# EAGLE board akabeacon_square_type2_MDBT40 (EAGLE 7.2.0)
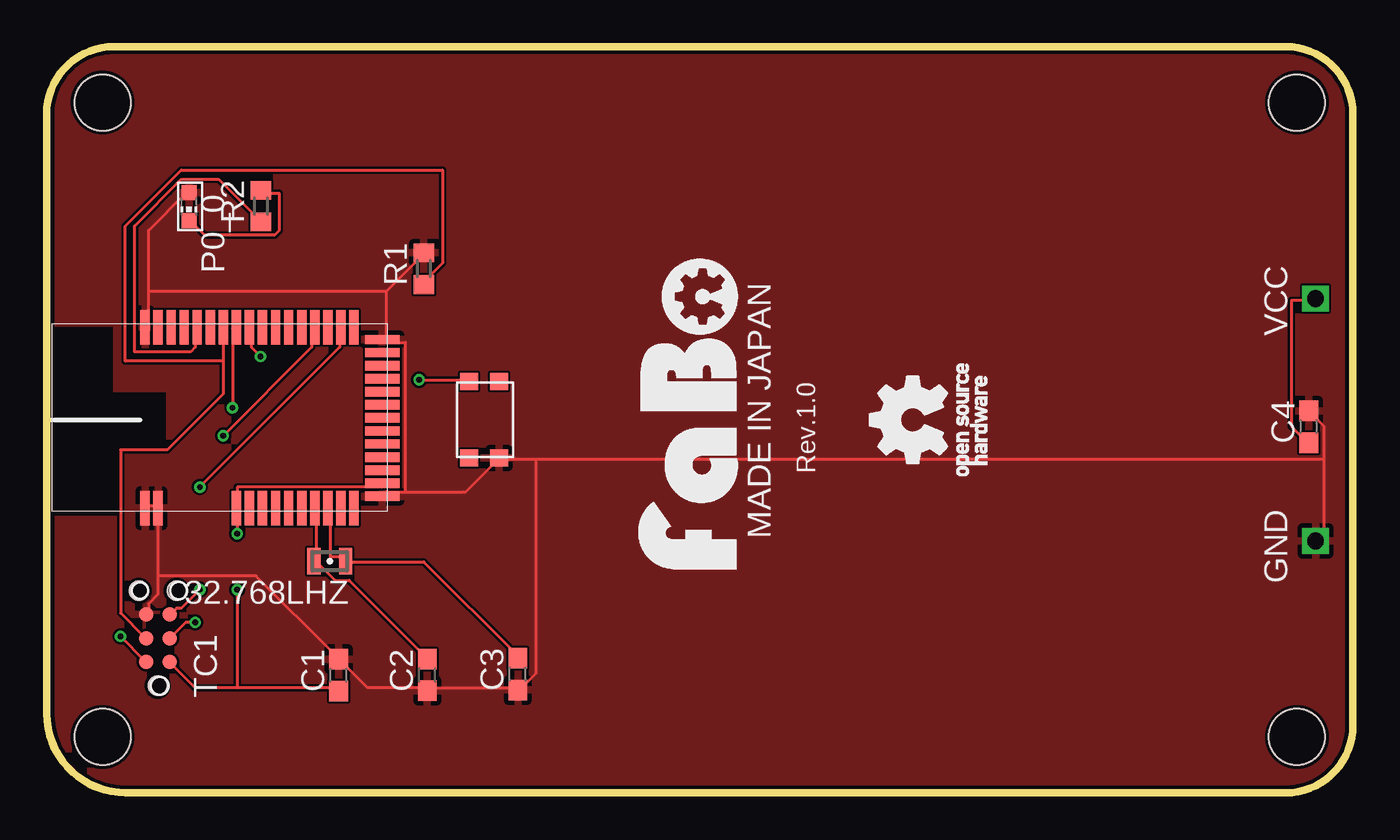
[diagram p0: board, top side]
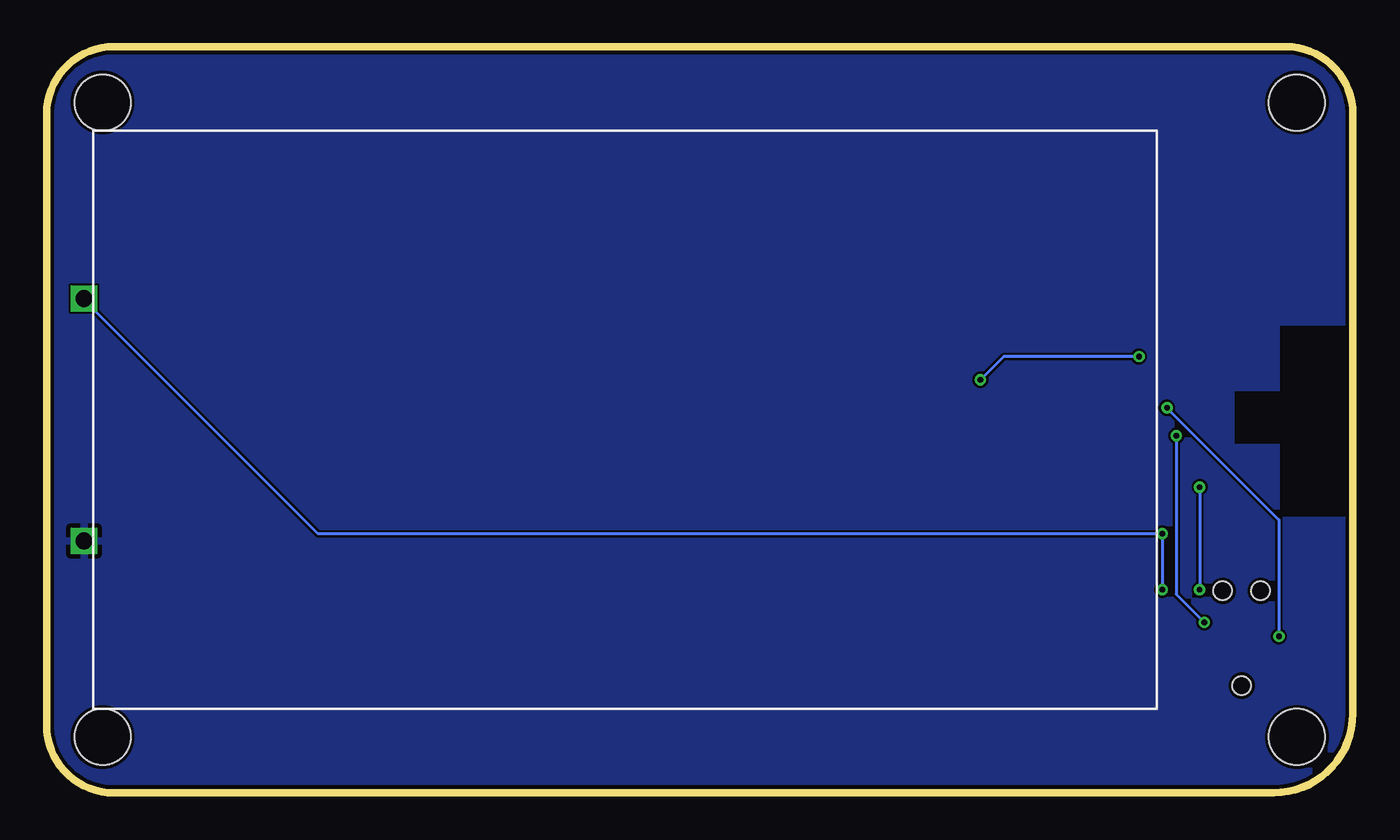
[diagram p1: board, bottom side, seen from below]

Size 70 x 40 mm. Coordinates in mm from the lower left corner, seen from the top.
Copper layers (1*16): Top 0.035mm / dielectric 1.5mm / Bottom 0.035mm
Design rules "SeeedStudio_2layer_DRU_no_angle_20140221 *": minimum track width 6mil, minimum drill 12mil, track to track 5mil, track to pad 5mil, pad to pad 5mil, via to via 5mil, smd to smd 0mil, copper to edge 8mil, drill to drill 8mil, minimum pad ring 10mil, minimum via ring 6mil, stop-mask expansion 2mil, vias tented up to drill 100mil, thermal gap 10mil
tRestrict: area -1,14.9 to 3.5,25; area 3.6,18.6 to 6.4,21.4
bRestrict: area -1.1,14.8 to 3.9,25; area 3.5,18.7 to 6.3,21.5

## Footprints (pad centres in the part's own frame; a part is rotated, then mirrored left to right if it is on the bottom)
FC-12M = smd 0.7 x 1.4: 1 -0.85,0; 2 0.85,0
C0603 = smd 1.1 x 1: 1 -0.85,0; 2 0.85,0
CHIP-LED0603 = smd 0.8 x 0.8: A 0,-0.75; C 0,0.75
R0603 = smd 1 x 1.1: 1 -0.85,0; 2 0.85,0
TC2030-IDC-NL = smd 0.787 x 0.787: 1 -1.27,-0.635; 2 -1.27,0.635; 3 0,-0.635; 4 0,0.635; 5 1.27,-0.635; 6 1.27,0.635 | hole 0.991: -2.54,0; 2.54,1.016; 2.54,-1.016
RAYTAC-MDBT40 = smd 1.85 x 0.5: 1 -4.86,4; 2 -4.86,3.3; 3 -4.86,-0.9; 4 -4.86,-1.6; 5 -4.86,-2.3; 6 -4.86,-3; 7 -4.86,-3.7; 8 -4.86,-4.4; 9 -4.86,-5.1; 10 -4.86,-5.8; 11 -4.86,-6.5; 12 -4.86,-7.2; 26 4.84,-7.2; 27 4.84,-6.5; 28 4.84,-5.8; 29 4.84,-5.1; 30 4.84,-4.4; 31 4.84,-3.7; 32 4.84,-3; 33 4.84,-2.3; 34 4.84,-1.6; 35 4.84,-0.9; 36 4.84,-0.2; 37 4.84,0.5; 38 4.84,1.2; 39 4.84,1.9; 40 4.84,2.6; 41 4.84,3.3; 42 4.84,4 | smd 0.5 x 1.85: 13 -4.22,-8.71; 14 -3.52,-8.71; 15 -2.82,-8.71; 16 -2.12,-8.71; 17 -1.42,-8.71; 18 -0.72,-8.71; 19 -0.02,-8.71; 20 0.68,-8.71; 21 1.38,-8.71; 22 2.08,-8.71; 23 2.78,-8.71; 24 3.48,-8.71; 25 4.18,-8.71
SQUARE-TYPE2-TC2030 = drill 0.9 square: GND 33,-6.5; VCC 33,6.5 | hole 3: -32,17; -32,-17; 32,-17; 32,17
SWITCH-4P(KMR2) = smd 0.9 x 0.95: 1 -1,0; 2 3.1,0; 3 -1,-1.6; 4 3.1,-1.6

## Placement (x,y rotation side)
32.768LHZ  FC-12M  [FC-12M]  15.17,12.42 180 top
C1  0.1uf  [C0603]  15.65,6.31 90 top
C2  12pf  [C0603]  20.4,6.32 90 top
C3  12pf  [C0603]  25.25,6.37 90 top
C4  0.1uf  [C0603]  67.64,19.63 90 top
P0_0  [CHIP-LED0603]  7.63,31.42 180 top
R1  10K  [R0603]  20.21,28.1 90 top
R2  [R0603]  11.48,31.45 90 top
TC1  [TC2030-IDC-NL]  5.96,8.29 90 top
U$3  RAYTAC-MDBT40  [RAYTAC-MDBT40]  9.27,20.12 90 top
U$5  SQUARE-TYPE2-TC2030  [SQUARE-TYPE2-TC2030]  35,20 0 top
U$6  SWICTH-4P(KMR2)  [SWITCH-4P(KMR2)]  22.64,18.95 90 top

## Library data of the parts
32.768LHZ = crystal
C1-C4 R1 R2 = adafruit
P0_0 = led
TC1 = TagConnect
U$3 = gclueBT
U$5 = GClue-Beacon
U$6 = gclue-test

## Nets
+3V3: C1.1 C4.1 TC1.1 U$3.3 U$3.14 U$5.VCC
GND: C1.2 C2.1 C3.1 C4.2 P0_0.A R1.2 TC1.6 U$3.1 U$3.2 U$3.13 U$3.25 U$3.42 U$5.GND U$6.3
LED1: P0_0.C R2.2
N$7: 32.768LHZ.2 C2.2 U$3.9
N$8: 32.768LHZ.1 C3.2 U$3.10
P0_00: U$3.17
P0_01: U$3.18
P0_02: U$3.19
P0_03: U$3.20
P0_04: U$3.21
P0_05: U$3.22
P0_06: U$3.23
P0_07: U$3.24
P0_08: U$3.26
P0_09: TC1.5 U$3.27
P0_10: U$3.28
P0_11: TC1.3 U$3.29
P0_12: U$3.30
P0_13: U$3.31
P0_14: U$3.32
P0_15: U$3.33
P0_16: U$3.34 U$6.2
P0_18: R2.1 U$3.38
P0_19: U$3.39
P0_21: U$3.4
P0_22: U$3.5
P0_23: U$3.6
P0_24: U$3.7
P0_25: U$3.8
P0_28: U$3.11
P0_29: U$3.12
P0_30: U$3.16
SWCLK: R1.1 TC1.4 U$3.36
SWDIO: TC1.2 U$3.35

## Tracks (layer width: path | path; a pad name or v marks a point on that pad's centre or on a via)
+3V3  (via drill 0.3)
  Top 0.152: C4.1 67.46,18.89 66.71,19.64 66.71,26.39 67.96,26.39 U$5.VCC | 10.21,5.64 15.46,5.64 C1.1 | 10.21,5.64 7.96,5.64 6.71,6.89 TC1.1 | U$3.14 17.96,16.39 10.21,16.39 10.21,15.39 U$3.3 10.21,15.14 v10.21,13.89 | v10.21,10.89 10.21,5.64
  Bottom 0.152: v10.21,10.89 v10.21,13.89 55.46,13.89 67.96,26.39 U$5.VCC
GND
  Top 0.152: 5.96,11.64 5.96,15.14 U$3.2 5.96,15.39 5.46,15.39 U$3.1 | 5.96,11.64 5.96,10.64 5.46,10.14 5.46,9.64 TC1.6 | 5.96,11.64 11.21,11.64 15.46,7.39 C1.2 15.71,7.14 17.21,5.64 20.21,5.64 C2.1 20.46,5.64 25.21,5.64 C3.1 25.46,5.64 26.21,6.39 26.21,17.89 | 68.46,17.89 68.46,13.64 68.21,13.64 U$5.GND | 68.46,17.89 68.46,19.64 67.71,20.39 C4.2 | 19.21,16.14 18.21,16.14 U$3.13 | 19.21,16.14 22.46,16.14 24.21,17.89 U$6.3 24.46,17.89 26.21,17.89 | 18.21,26.89 20.21,28.89 R1.2 | 18.21,26.89 18.21,24.39 U$3.25 18.21,24.14 19.21,24.14 19.21,16.14 | 5.46,26.89 5.46,25.14 U$3.42 | 5.46,26.89 5.46,30.14 7.46,32.14 P0_0.A | 5.46,26.89 18.21,26.89 | 26.21,17.89 68.46,17.89
  pour Bottom: 0.21,0.14 70.21,0.14 70.21,40.14 0.21,40.14
  pour Top: 0.21,0.14 70.21,0.14 70.21,40.14 0.21,40.14
LED1
  Top 0.152: P0_0.C 7.71,30.64 8.46,29.89 12.21,29.89 12.46,30.14 12.46,32.14 11.71,32.14 R2.2
N$7
  Top 0.152: C2.2 20.21,7.39 16.21,11.39 15.46,11.39 14.46,12.39 32.768LHZ.2 14.46,12.64 14.46,15.14 U$3.9
N$8
  Top 0.152: C3.2 25.21,7.39 20.21,12.39 16.21,12.39 32.768LHZ.1 15.96,12.64 15.21,12.64 15.21,15.14 U$3.10
P0_09  (via drill 0.3)
  Top 0.152: v8.21,10.89 7.21,9.89 6.96,9.89 6.71,9.64 TC1.5 | v8.21,16.39 15.71,23.89 15.71,24.89 U$3.27
  Bottom 0.152: v8.21,16.39 v8.21,10.89
P0_11  (via drill 0.3)
  Top 0.152: v7.96,9.14 7.46,9.14 6.71,8.39 TC1.3 | v9.46,19.14 14.21,23.89 14.21,24.89 U$3.29
  Bottom 0.152: v7.96,9.14 9.46,10.64 v9.46,19.14
P0_16  (via drill 0.3)
  Top 0.152: v19.96,22.14 22.46,22.14 U$6.2 | v11.46,23.39 10.96,23.89 10.96,24.89 U$3.34
  Bottom 0.152: v19.96,22.14 18.71,23.39 v11.46,23.39
P0_18
  Top 0.152: R2.1 11.46,30.64 9.21,32.89 7.21,32.89 4.71,30.39 4.71,23.64 7.71,23.64 7.96,23.89 7.96,24.89 U$3.38
SWCLK
  Top 0.152: 9.46,23.14 9.46,24.89 U$3.36 | 9.46,23.14 9.46,21.39 6.46,18.39 3.96,18.39 3.96,9.64 5.21,8.39 TC1.4 | 9.46,23.14 4.21,23.14 4.21,30.39 7.21,33.39 21.21,33.39 21.21,28.39 20.21,27.39 R1.1
SWDIO  (via drill 0.3)
  Top 0.152: v3.96,8.39 5.21,7.14 TC1.2 | v9.96,20.64 9.96,24.89 U$3.35
  Bottom 0.152: v3.96,8.39 3.96,14.64 v9.96,20.64

## Text on the board
tPlace: Rev.1.0